# Altium PCB ir-tara-f-09-1403.PcbDoc
Units mm, origin at the board's own origin, x right, y up, seen from the top; angles counter-clockwise.
Board outline 151 x 86.38 mm, 2 copper layers (Top Layer, Bottom Layer); 25 components, 21 nets, 70 pads, 0 vias.
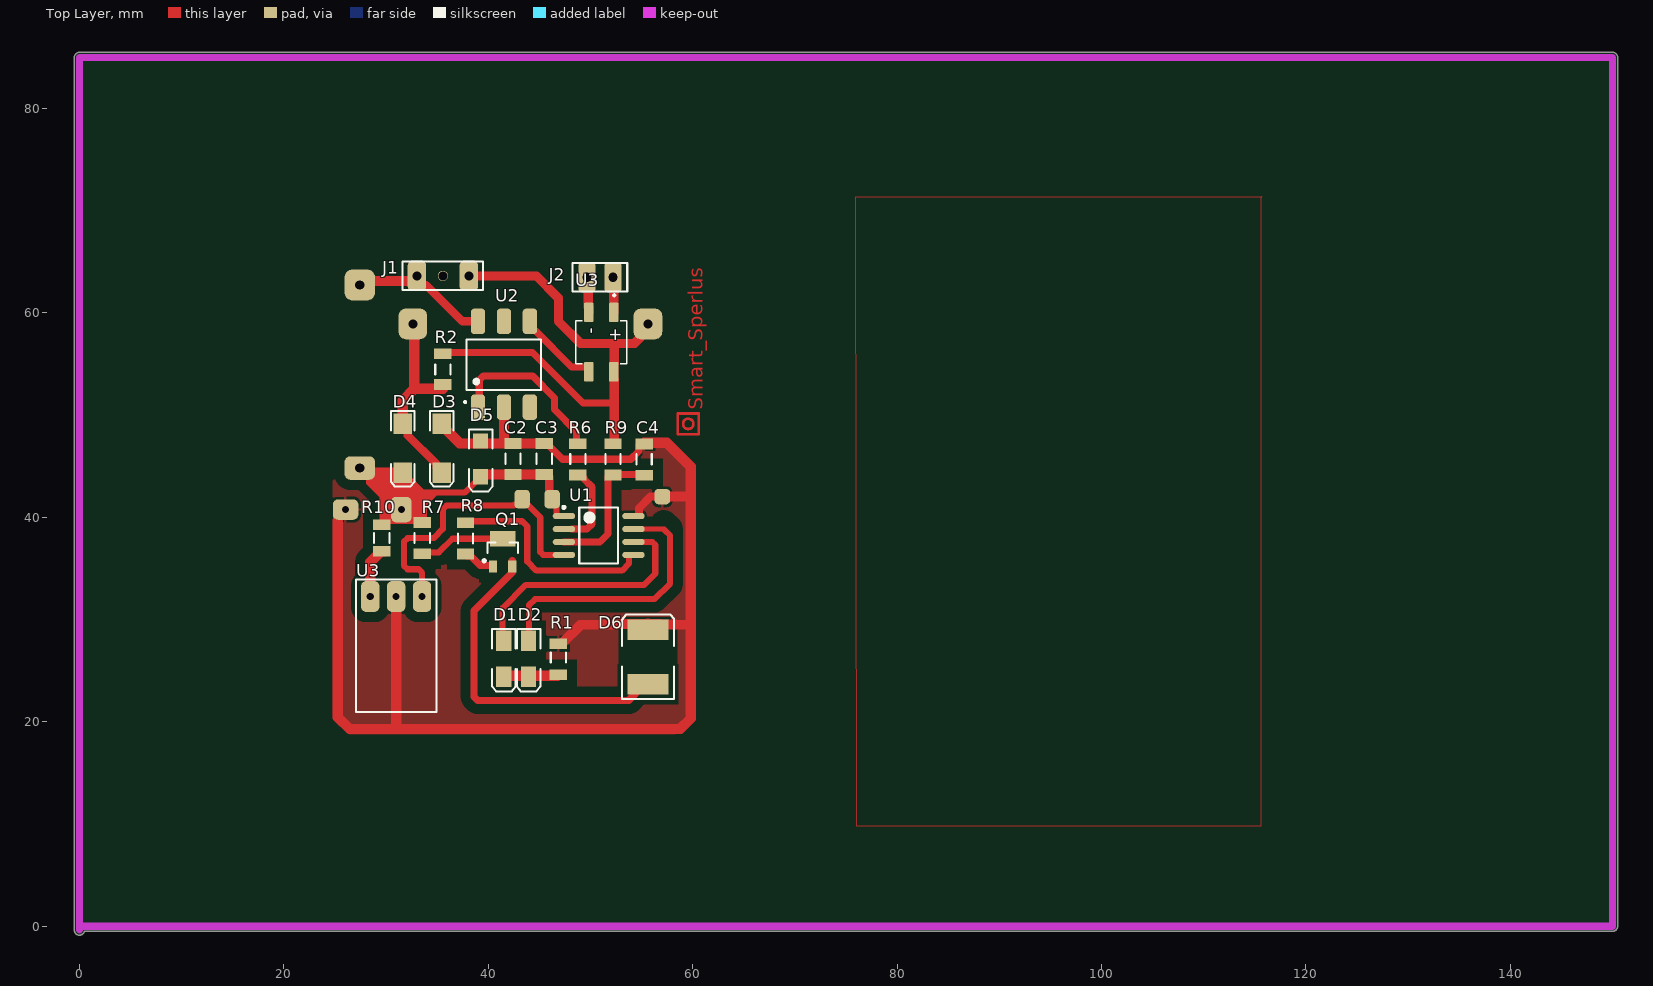
[diagram p0: Top Layer view]
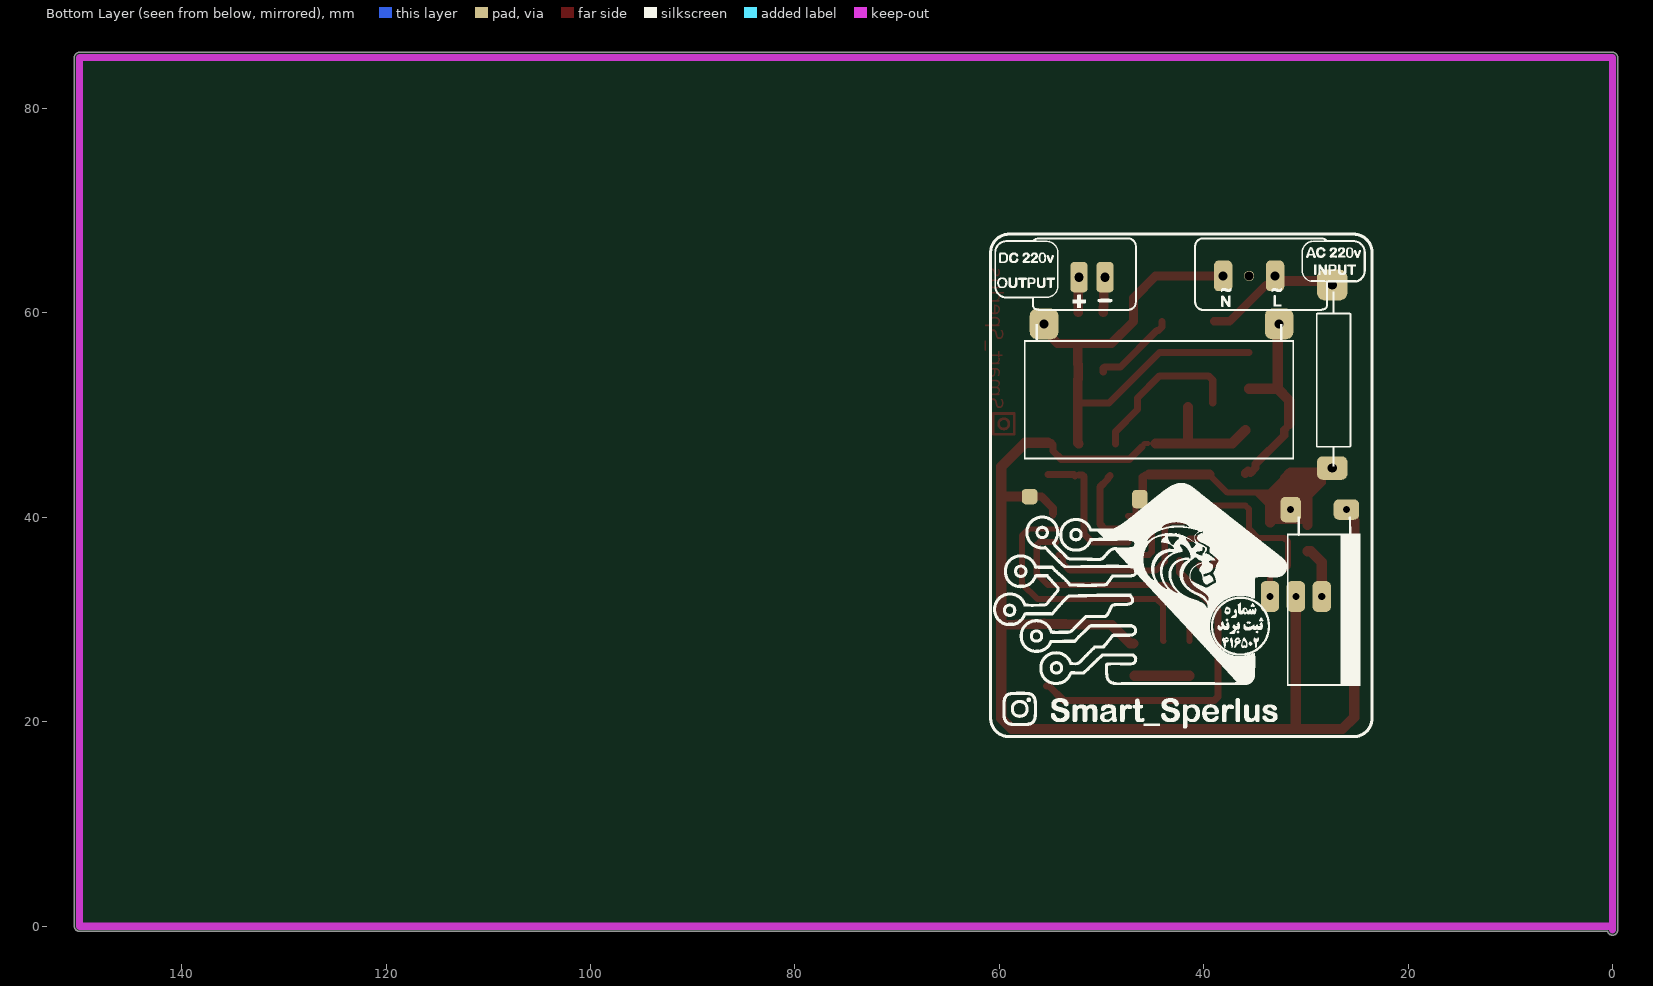
[diagram p1: Bottom Layer view, seen from below]
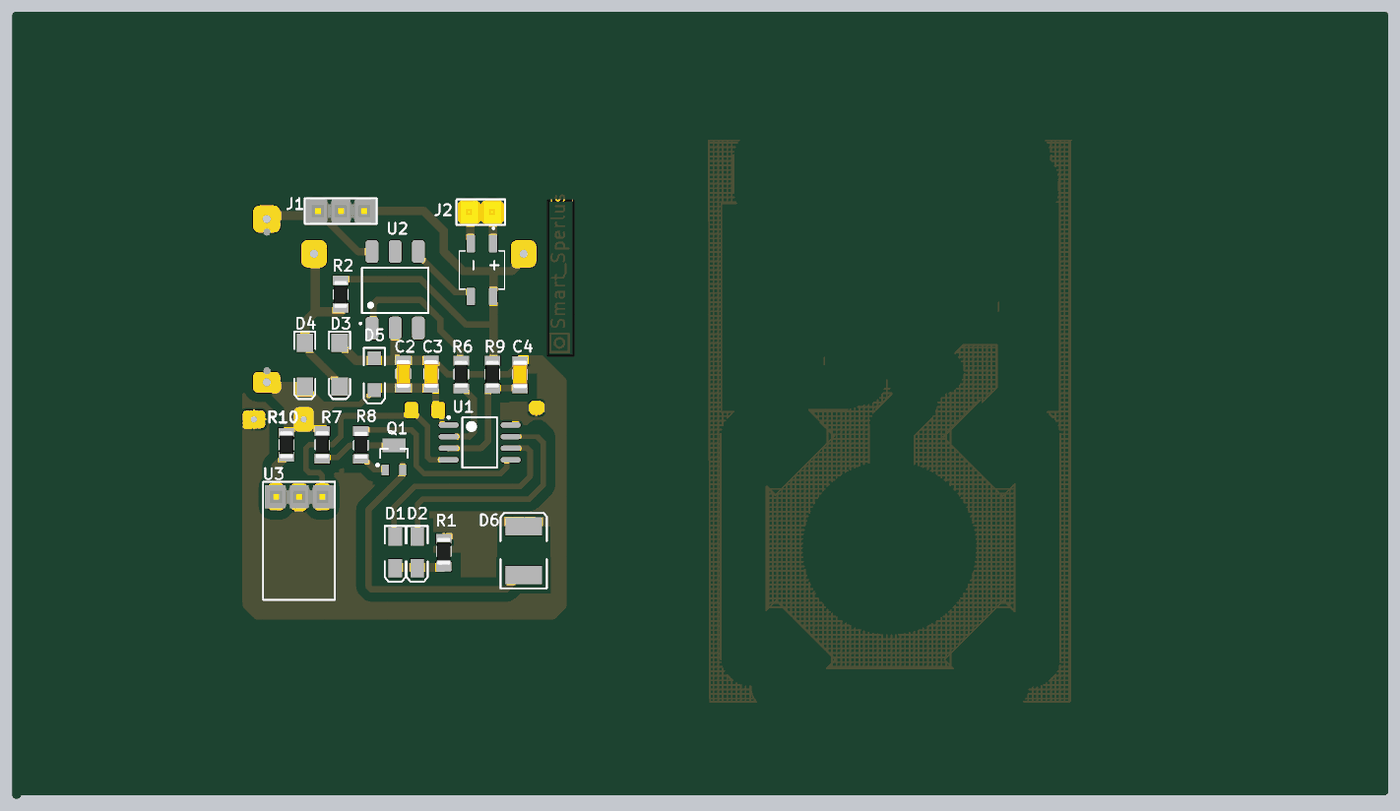
[diagram p2: 3D render of the assembled board from above, using the file's embedded part models]

## Layer stack, top to bottom
Top Solder: solder mask 0.0102, Solder Resist, Dk 3.5
Top Layer: signal copper 0.0356
Dielectric 1: dielectric 0.32, FR-4, Dk 4.8
Bottom Layer: signal copper 0.0356
Bottom Solder: solder mask 0.0102, Solder Resist, Dk 3.5

## Board outline
-0.5,-0.381 -0.5,85 cw(c0,85) 0,85.5 150,85.5 cw(c150,85) 150.5,85 150.5,0 cw(c150,0) 150,-0.5 0.486,-0.5 cw(c0,-0.381)

## Design rules (kind name [scope] priority, off if disabled: settings)
Clearance Clearance_1 [InPolygon] p1: gap=1 ignorepadtopadclearanceinfootprint=FALSE
Clearance [All] p2: gap=0.6 ignorepadtopadclearanceinfootprint=FALSE
PolygonConnect [All] p1: connectstyle=Relief reliefconductorwidth=0.254 reliefentries=4 polygonreliefangle="90 Angle" airgapwidth=0.254
RoomDefinition ir-kh [InComponentClass('ir-kh')] p1: confinementstyle=ConfineIn formatcopy=TRUE lockcomponents=FALSE outline 144.907,-4.953 247.904,-4.953 247.904,23.114 144.907,23.114
RoutingLayers [All] p1: top layer_v5=FALSE bottom layer_v5=TRUE
RoutingVias [All] p1: holewidth=0.711 width=2.5 viastyle="Through Hole" minholewidth=0.711 minwidth=1.27 maxholewidth=0.711 maxwidth=2
SolderMaskExpansion [All] p1: expansion=0.102 istentingtop=FALSE
Width [All] p1: maxlimit=3 minlimit=0.5 preferedwidth=1
29 further rules are at their usual default settings.

## Components (designator, comment, footprint, x,y, rotation, side; value= is the part's Value field where it differs from the comment)
C1 "1uf 400v" "1uf 400v" 56.227,54.356 r180 bottom value=1uF
C2 "=Value" "CAP 1206"#1 42.418,45.72 r90 top
C3 "=Value" "CAP 1206"#1 45.466,45.72 r90 top
C4 "=Value" "CAP 1206"#2 55.245,45.72 r270 top
D1 "LED2" 3.2X1.6X1.1#1 41.529,26.162 r270 top
D2 "LED2" 3.2X1.6X1.1#1 43.942,26.162 r270 top
D3 "D Tunnel1" 3.2X1.6X1.1#2 35.433,46.863 r270 top
D4 "D Tunnel1" 3.2X1.6X1.1#2 31.623,46.863 r270 top
D5 "D Tunnel1" 3.2X1.6X1.1#3 39.243,45.72 r270 top
D6 "LED2" 3.2X1.6X1.1#4 55.626,26.416 r90 top
J1 "Header3X1" "HEADER 3X1"#1 33.02,63.627 r0 top
J2 "Header2X1" "Header 2X1" 50.927,63.5 r0 top
Q1 "QNPN" SOT-23B_L 41.402,36.83 r90 top
R1 "10K" "RES 1206 (3216X08L)"#1 46.863,26.289 r90 top
R2 "10K" "RES 1206 (3216X08L)"#2 35.56,54.483 r270 top
R3 "10K" Res-(2/1) 27.432,62.992 r270 bottom
R6 "10K" "RES 1206 (3216X08L)"#3 48.768,45.72 r270 top
R7 "10K" "RES 1206 (3216X08L)"#4 33.528,37.973 r90 top
R8 "10K" "RES 1206 (3216X08L)"#4 37.774,37.937 r270 top
R9 "10K" "RES 1206 (3216X08L)"#3 52.197,45.72 r270 top
R10 "10K" "RES 1206 (3216X08L)"#5 29.591,37.973 r90 top
U1 "ATtiny15L-1SC" 8S2_N 50.8,38.227 r0 top
U2 "K3021P" DIP762W50P254L730H410Q6 41.529,55.084 r90 top
U3 "Header3X1" "HEADER 3X1"#2 28.448,32.258 r0 top (schematic designator J3)
U3 "MB6S" SOIC245P670X270-4N 51.054,57.15 r270 top

## Footprints (in the part's own frame and the unit in brackets; to place one, negate y for a bottom-side part, rotate by r counter-clockwise, add the part's x,y. Pads: shape width x height; smd on the part's side, far side on the other; paste and mask are expansions set on the pad)
"1uf 400v" [mm] "24*9mm"
  rrect50% 2.8x3 hole 0.9: 1(0.601,4.572) 2(23.601,4.572)
3.2X1.6X1.1#1 [mm] "SMT LED; 2 Flat Leads"
  rect 2x1.5 smd: 1(-1.75,0) 2(1.75,0)
  silkscreen extent -2.9,-1.15 3.2,1.15
3.2X1.6X1.1#2 [mm] "SMT LED; 2 Flat Leads"
  rect 2x1.8 smd: 1(-2.296,0) 2(2.504,0)
  silkscreen extent -3.54,-1.15 3.86,1.15
3.2X1.6X1.1#3 [mm] "SMT LED; 2 Flat Leads"
  rect 1.5x1.5 smd: 1(-1.75,0) 2(1.75,0)
  silkscreen extent -2.9,-1.15 3.2,1.15
3.2X1.6X1.1#4 [mm] "SMT LED; 2 Flat Leads"
  rect 2x4 smd: 1(-2.75,0) 2(2.6,0)
  silkscreen extent -4.19,-2.54 4.06,2.54
8S2_N [mm] "SOP, 8-Leads, Body 5.3x5.3mm, Pitch 1.27mm, IPC Medium Density"
  oval 2.2x0.6 smd: 1(-3.4,1.905) 2(-3.4,0.635) 3(-3.4,-0.635) 4(-3.4,-1.905) 5(3.4,-1.905) 6(3.4,-0.635) 7(3.4,0.635) 8(3.4,1.905)
  silkscreen extent -3.52,-2.75 1.9,2.88, body extent -2.73,-2.75 2.73,2.75, height 2.16
"CAP 1206"#1 [mm]
  rect 1.05x1.7 smd: 1(-1.533,0) 2(1.517,0)
  silkscreen extent -0.47,-0.75 0.53,0.75, body extent -1.49,-0.77 1.55,0.75, height 0.75
"CAP 1206"#2 [mm]
  rect 1.05x1.7 smd: 1(-1.461,0) 2(1.589,0)
  silkscreen extent -0.47,-0.75 0.53,0.75, body extent -1.49,-0.77 1.55,0.75, height 0.75
DIP762W50P254L730H410Q6 [mm]
  rrect50% 2.5x1.4 smd: 1(-4.302,2.54) 2(-4.302,0) 3(-4.302,-2.54) 4(4.098,-2.54) 5(4.098,0) 6(4.098,2.54)
  silkscreen extent -3.9,-3.65 2.32,3.9
"Header 2X1" [mm]
  rrect50% 1.7x3 hole 0.9: 1(-1.27,0) 2(1.27,0)
  silkscreen extent -2.67,-1.4 2.67,1.4, body extent -2.54,-1.27 2.54,1.27, height 9.5
"HEADER 3X1"#1 [mm]
  rrect50% 1.8x3 hole 0.9: 1(0,0) 3(5.08,0)
  round 1 hole 0.9: 2(2.54,0)
  silkscreen extent -1.4,-1.4 6.48,1.4, body extent -1.24,-1.27 6.38,1.27, height 8.38
"HEADER 3X1"#2 [mm]
  rrect50% 1.778x3 hole 0.7: 1(0,0) 2(2.54,0) 3(5.08,0)
  silkscreen extent -1.4,-11.3 6.48,1.65, body extent -1.24,-1.27 6.38,1.27, height 8.38
"RES 1206 (3216X08L)"#1 [mm] "Chip Resistor, 2-Leads, Body 3.2x1.6mm, IPC High Density _ (0.125 W)"
  rect 1.05x1.7 smd: 1(-1.691,0) 2(1.359,0)
  silkscreen extent -0.5,-0.75 0.5,0.75, body extent -1.52,-0.76 1.53,0.76, height 0.6
"RES 1206 (3216X08L)"#2 [mm] "Chip Resistor, 2-Leads, Body 3.2x1.6mm, IPC High Density _ (0.125 W)"
  rect 1.05x1.7 smd: 1(-1.533,0) 2(1.483,0)
  silkscreen extent -0.5,-0.75 0.5,0.75, body extent -1.52,-0.76 1.53,0.76, height 0.6
"RES 1206 (3216X08L)"#3 [mm] "Chip Resistor, 2-Leads, Body 3.2x1.6mm, IPC High Density _ (0.125 W)"
  rect 1.05x1.7 smd: 1(-1.486,0) 2(1.564,0)
  silkscreen extent -0.5,-0.75 0.5,0.75, body extent -1.52,-0.76 1.53,0.76, height 0.6
"RES 1206 (3216X08L)"#4 [mm] "Chip Resistor, 2-Leads, Body 3.2x1.6mm, IPC High Density _ (0.125 W)"
  rect 1.05x1.7 smd: 1(-1.533,0) 2(1.517,0)
  silkscreen extent -0.5,-0.75 0.5,0.75, body extent -1.52,-0.76 1.53,0.76, height 0.6
"RES 1206 (3216X08L)"#5 [mm] "Chip Resistor, 2-Leads, Body 3.2x1.6mm, IPC High Density _ (0.125 W)"
  rect 1.05x1.7 smd: 1(-1.295,0) 2(1.301,0)
  silkscreen extent -0.5,-0.75 0.5,0.75, body extent -1.52,-0.76 1.53,0.76, height 0.6
Res-(2/1) [mm]
  rrect50% 3x3 hole 0.9: 1(0.254,0)
  rrect50% 2.3x3 hole 0.9: 2(18.161,0)
  body extent 1.28,-1.98 17.32,1.92, height 7.03
SOIC245P670X270-4N [mm]
  rrect23% 1.91x0.91 smd: 1(-2.9,1.225) 2(-2.9,-1.225) 3(2.9,-1.225) 4(2.9,1.225)
  silkscreen extent -4.68,-2.48 2.1,2.48
SOT-23B_L [mm] "SOT23, 3-Leads, Body 2.9x1.3mm, Pitch 0.95mm, Lead Span 2.4mm, IPC High Density"
  rect 1.2x0.8 smd: 1(-1.63,0.95) 2(-1.63,-0.95)
  rect 1.5x2.5 smd: 3(1.075,0)
  silkscreen extent -1.2,-1.5 0.7,1.92, body extent -0.7,-1.5 0.7,1.5, height 1.14

## Part data
C1: "Capacitor 24*9mm", ComponentLinkURL=www.picpars.com, Designer="Seyed Mohsen Ghasemain"
C2 C3 C4: library part Capacitor, "Capacitor"
D1 D2 D6: "Typical RED, GREEN, YELLOW, AMBER GaAs LED", LatestRevisionDate=17-Jul-2002, LatestRevisionNote="Re-released for DXP Platform.", PackageDescription="SM LED; 2 Flat Leads", PackageReference=3.2X1.6X1.1, PackageVersion=Feb-2002, Published=8-Jun-2000, Publisher="Altium Limited"
D3 D4 D5: "Tunnel Diode - RLC Model", LatestRevisionDate=17-Jul-2002, LatestRevisionNote="Re-released for DXP Platform.", PackageDescription="SM LED; 2 Flat Leads", PackageReference=3.2X1.6X1.1, PackageVersion=Feb-2002, Published=8-Jun-2000, Publisher="Altium Limited"
Q1: "NPN Bipolar Transistor", LatestRevisionDate=29-May-2009, LatestRevisionNote="IPC-7351 Footprint Added.", PackageDescription="3-Pin SOT-23 Package 0.95 mm Pitch, 2.4 mm Lead Span", PackageReference=SOT-23B, PackageVersion=Aug-1999, Published=8-Jun-2000, Publisher="Altium Limited"
R1 R2 R3 R6 R7 R8 R9 R10: library part Resistor, "Resistor", Power="1/4 W", Tolerance=5%
U1: "8-Bit AVR Microcontroller with 1K Byte of Flash Memory", Supplier Part Number 1=ATTINY15L-1SC-ND, ComponentLink1Description=Datasheet, ComponentLink1URL=http://www.atmel.com/dyn/resources/prod_documents/doc1187.pdf, ComponentLink2Description="Atmel.com Home", ComponentLink2URL=http://www.atmel.com, DatasheetVersion=1187E-AVR-06/02, LatestRevisionDate=16-Oct-2006, LatestRevisionNote="IPC-7351 Footprint Added.", PackageDescription="8-Lead, 0.208\" Body, Plastic Small Outline Package (EIAJ)", PackageReference=8S2, PackageVersion="revF, Apr-2008", Published=17-Sep-2003, Publisher="Altium Limited", Supplier 1=Digi-Key, Supplier 2=Mouser, Supplier Part Number 2=556-ATTINY15L1SC
U2: "Optoisolator Triac Output 5300Vrms 1 Channel 6-DIP", Package="DIP-6 Vishay", Availability=Unavailable, DigiKey-Purchase-URL=https://snapeda.com/shop?store=DigiKey&id=291595, MF="Vishay Semiconductor", Mouser-Purchase-URL=https://snapeda.com/shop?store=Mouser&id=291595, MP=K3021P, Price=None, SnapEDA_Link=https://www.snapeda.com/parts/K3021P/Vishay%20Semiconductor%20Opto%20Division/view-part/291595/?ref=snap
U3: "Bridge Rectifier Single Phase Standard 600V Surface Mount 4-SOIC", Package="BESOP-4 Surge Components", Digi-Key_Part_Number=MB6SCT-ND, Digi-Key_Purchase_URL=https://www.digikey.com.tr/product-detail/en/on-semiconductor/MB6S/MB6SCT-ND/965654?utm_source=snapeda&utm_medium=aggregator&utm_campaign=symbol, MF="ON Semiconductor", MP=MB6S, SnapEDA_Link=https://www.snapeda.com/parts/MB6S/ON%20Semiconductor/view-part/2774209/?ref=snap

## Free pads (board coordinates)
  rrect50% 2x2.5 hole 0.7: 4(31.496,40.767)
  rrect50% 2.5x2 hole 0.7: 5(26.035,40.767)
  rrect50% 1.524x1.524 all layers, no hole: 6(57.023,42.037)
  rrect50% 1.524x1.8 all layers, no hole: 8(46.257,41.783) 9(43.307,41.783)

## Nets (pads, with @x,y where several pads share a name; then routed paths per layer and width w, separated by ;. In a path a pad name is that pad's centre, name@x,y a point inside that pad or via, vN(x,y) a via of type N, cw(c..) or ccw(c..) an arc to the next point about the centre after c; other vN are vias at no path point)
GND: C2.2 C3.2 C4.1 D3.1 D5.1 D6.2 pad.5 pad.6 R1.2 U1.8 U2.2 U3.2@30.988,32.258 | length 143.4
  Top Layer w0.5: C3.2 45.791,47.237 46.066,46.962 C3.2@46.066,46.898 ; U1.8@54.684,40.132 U1.8@54.73,40.178
  Top Layer w0.7: C3.2@46.066,46.898 47.272,45.692 53.947,45.692 54.745,46.49 54.745,47.133 54.92,47.308 C4.1@55.245,47.308
  Top Layer w0.8: U1.8@54.737,40.386 54.737,40.894 55.88,42.037 pad.6
  Top Layer w1: pad.5@25.847,40.452 25.47,40.452 25.285,40.267 25.285,39.693 25.273,39.681 25.273,20.447 26.416,19.304 30.734,19.304 ; U3.2@30.988,32.258 30.988,19.558 30.734,19.304 ; D3.1@35.923,48.532 37.218,47.237 D5.1@38.993,47.237 ; D5.1@38.968,47.237 41.529,47.237 ; U2.2 41.529,47.237 ; C3.2@44.696,47.237 C2.2 41.529,47.237 ; R1.2 47.213,27.673 48.999,29.459 55.626,29.591 59.817,29.464 ; C4.1@55.245,47.308 57.467,47.308 59.817,44.958 59.817,42.164 ; pad.6 59.69,42.037 59.817,42.164 ; 30.734,19.304 58.801,19.304 59.817,20.32 59.817,29.464 ; 59.817,29.464 59.817,42.164
ir-r: pad.9 U1.4 U3.3@33.528,32.258 | length 29.3
  Top Layer w0.6: U3.3@33.528,32.512 33.528,34.574 33.177,34.925 32.101,34.925 31.75,35.276 31.75,37.622 32.101,37.973 34.659,37.973 35.56,38.874 35.56,40.797 35.911,41.148 42.494,41.148 42.579,41.233 42.851,41.233 pad.9@43.307,41.689 ; U1.4 45.378,36.322 45.085,36.615 45.085,40.005 43.857,41.233 43.763,41.233 pad.9@43.307,41.689 ; pad.9@43.307,41.689 pad.9 pad.9@43.307,41.689
ir-t: R8.1 U1.5 | length 21.6
  Top Layer w0.6: R8.1 37.929,39.624 43.307,39.624 43.815,39.116 43.815,35.687 44.704,34.798 53.086,34.798 53.761,35.473 53.761,36.322 U1.5
l1: D2.1 U1.7 | length 26.5
  Top Layer w0.5: U1.7 57.016,38.862
  Top Layer w0.6: D2.1 43.978,27.948 43.978,31.405 44.577,32.004 56.261,32.004 57.785,33.528 57.785,38.227 57.224,38.788
l2: D1.1 U1.6 | length 24.4
  Top Layer w0.6: D1.1@41.402,27.912 41.402,31.115 43.688,33.401 55.245,33.401 56.343,34.499 56.343,37.299 56.05,37.592 U1.6@54.402,37.592
NetC1_2: C1.2 D3.2 D4.1 R2.2 | length 19
  Top Layer w0.8: D4.1@32.023,48.659 32.123,48.559 32.123,48.024 34.933,45.214 34.933,44.859 D3.2 ; D3.2@35.673,44.599 35.941,44.332 D3.2@35.941,44.232
  Top Layer w1: D4.1 31.623,51.435 32.766,52.578 R2.2@35.56,52.578 ; 32.766,52.705 32.766,58.78 C1.2@32.787,58.801
NetD1_2: D1.2 D2.2 R1.1 | length 8.1
  Top Layer w0.5: D1.2@41.402,24.412 D1.2 D2.2
  Top Layer w0.6: D2.2@43.849,24.505 D2.2 D2.2@44.035,24.505 ; R1.1@46.77,24.505 R1.1
  Top Layer w1: D1.2@41.402,24.505 D2.2@43.849,24.505 ; D2.2@44.035,24.505 R1.1@46.77,24.505
NetD6_1: D6.1 Q1.2 | length 32.3
  Top Layer w0.7: Q1.2@42.352,35.755 42.352,34.605 38.608,30.861 38.608,22.449 38.959,22.098 53.737,22.098 55.134,23.495 D6.1@55.372,23.495
NetJ2_1: J2.1 U3.2@49.829,60.05 | length 3.5
  Top Layer w0.9: J2.1 49.784,63.373 49.784,60.595 49.829,60.55 U3.2@49.829,60.05
NetJ2_2: J2.2 U3.1@52.279,60.05 | length 3.5
  Top Layer w0.9: J2.2@52.07,63.5 52.274,63.296 52.274,60.055 U3.1@52.279,60.05
NetJ3_1: R10.1 U3.1@28.448,32.258 | length 5.2
  Top Layer w1: U3.1@28.448,32.258 28.448,35.606 29.52,36.678 R10.1@29.845,36.678
NetQ1_1: Q1.3 R7.1 | length 8.5
  Top Layer w0.6: R7.1 33.669,36.581 35.17,36.581 36.499,37.91 Q1.3@41.402,37.91
NetQ1_2: Q1.1 R8.2 | length 3.1
  Top Layer w0.7: R8.2 37.949,36.245 38.274,36.245 39.213,35.306 Q1.1@40.402,35.306
NetR4_2: 
NetR6_1: R6.1 U2.1 | length 16
  Top Layer w0.7: U2.1@39.116,51.195 39.116,53.438 39.526,53.848 44.323,53.848 46.482,51.689 46.482,50.546 48.641,48.387 R6.1@48.641,47.206
NetU2_4: U2.4 U3.3@49.829,54.25 | length 8.3
  Top Layer w0.7: U2.4 44.069,58.632 44.419,58.282 44.588,58.282 48.154,54.716 49.724,54.716 49.829,54.611 U3.3@49.829,54.25
nol: C1.1 J1.3 R2.1 R9.1 U3.4 | length 51.4
  Top Layer w0.7: R2.1@35.56,56.134 44.323,56.134 49.276,51.181 52.324,51.181
  Top Layer w0.9: J1.3 44.704,63.627 46.863,61.468 46.863,59.182 49.022,57.023 52.324,57.023 ; R9.1 52.249,47.206 52.324,47.281 52.324,51.181 52.324,53.493 52.284,53.533 52.284,54.245 U3.4 52.284,54.255 52.284,54.967 52.324,55.007 52.324,57.023 ; C1.1@56.213,57.991 55.212,57.991 54.837,57.616 54.837,57.55 54.31,57.023 52.324,57.023
out: R6.2 U1.2 | length 7.3
  Top Layer w0.65: U1.2@48.175,38.862 49.657,38.862
  Top Layer w0.7: R6.2@49.18,44.069 49.368,43.881 49.368,43.754 50.165,42.957 50.165,39.37 49.657,38.862
vcc: C2.1 C3.1 D4.2 D5.2 pad.4 pad.8 R3.2 R7.2 R10.2 U1.1 | length 31.6
  Top Layer w0.6: 33.274,42.418 37.691,42.418 D5.2 ; C3.1 45.749,44.187 C3.1@45.974,43.962 ; pad.8@45.974,42.35 pad.8@46.257,42.067 ; pad.8 46.669,41.371 46.669,40.132 U1.1
  Top Layer w0.8: pad.8@45.974,42.35 C3.1@45.974,43.962
  Top Layer w1: R3.2@28.044,44.359 29.464,44.359 ; R10.2@29.845,39.274 29.845,43.978 29.464,44.359 ; 33.493,41.818 33.493,39.515 33.518,39.49 R7.2 ; 33.493,42.199 32.023,43.669 32.023,43.859 31.523,44.359 29.464,44.359 ; D5.2@39.46,44.187 C2.1@41.783,44.187 ; C2.1@41.91,44.187 41.919,44.196 C3.1@45.339,44.196
vdd: J1.1 R3.1 U2.6 | length 13.7
  Top Layer w0.8: R3.1 R3.1@27.813,63.119 ; J1.1@32.512,63.119 J1.1 ; J1.1@32.893,63.127 33.293,62.727 33.92,62.727 37.465,59.182 U2.6
  Top Layer w1: R3.1@27.813,63.119 J1.1@32.512,63.119
zero: C4.2 R9.2 U1.3 | length 13.5
  Top Layer w0.65: U1.3 47.405,37.587 50.922,37.587 51.697,38.362
  Top Layer w0.7: 51.697,38.362 51.697,43.981 51.872,44.156 R9.2 ; R9.2@52.578,44.069 52.708,44.199 C4.2@55.245,44.199
pads on no net: J1.2 U2.3 U2.5
copper on no net: | length 11.3
  Top Layer w0.254: 58.547,48.133 60.579,48.133 60.579,50.165 58.547,50.165 58.547,48.133 ; 60.071,49.149 ccw(c59.563,49.149) 60.071,49.149

## Polygon pours and split planes (outlines as drawn)
GND on Top Layer "GND_L01_P026" (solid, remove dead copper, pour order 26): 24.765,20.701 26.416,19.05 26.416,18.796 58.293,18.796 60.198,20.701 60.198,44.958 57.658,47.498 54.991,47.498 55.118,47.371 55.118,46.101 54.229,45.212 53.848,45.593 26.797,45.593 24.765,43.561 24.765,40.005
GND on Top Layer "NONET_L01_P024" (hatched 90Degree grid 0.5 track 0.2, shelved, pour order 24): 75.946,71.374 115.697,71.374 115.57,71.247 115.57,9.779 76.073,9.779

## Keep-outs
Keep-Out Layer:
  lines w0.7: 0,-0.381 0,85 150,85 150,0 0,0

## Other copper
Top Layer:
  region net vcc: 31.623,44.359 33.437,42.545 35.052,42.545 35.179,42.418 33.909,41.148 33.909,39.624 33.528,39.243 33.401,39.37 29.845,39.37 29.845,41.529 28.067,43.307 28.067,44.317
  pour cut-out: 52.705,29.083 58.547,29.083 58.547,22.352 57.15,23.749 52.705,23.749
  text "Smart_Sperlus" at 60.96,50.546 h1.4 r90

## Silkscreen, mask and mechanical layers (free items; w line width, h text height)
Bottom Overlay:
  drawing of 79 lines, arcs and shapes, not listed
Top Solder:
  lines w0.254: 58.293,47.752 61.087,47.752 61.087,64.77 58.293,64.77 58.293,47.752
Bottom Solder:
  lines w0.2: 23.114,18.034 23.114,68.326 61.722,68.326 61.722,18.034 23.114,18.034

## Text inside footprints (layer, text, board x,y; h text height)
U3: Top Overlay "+" at 51.944,58.549 h1.2 r270; Top Overlay "-" at 49.654,58.55 h1.2 r270